# EAGLE board avr_lag1 (EAGLE 5.07)
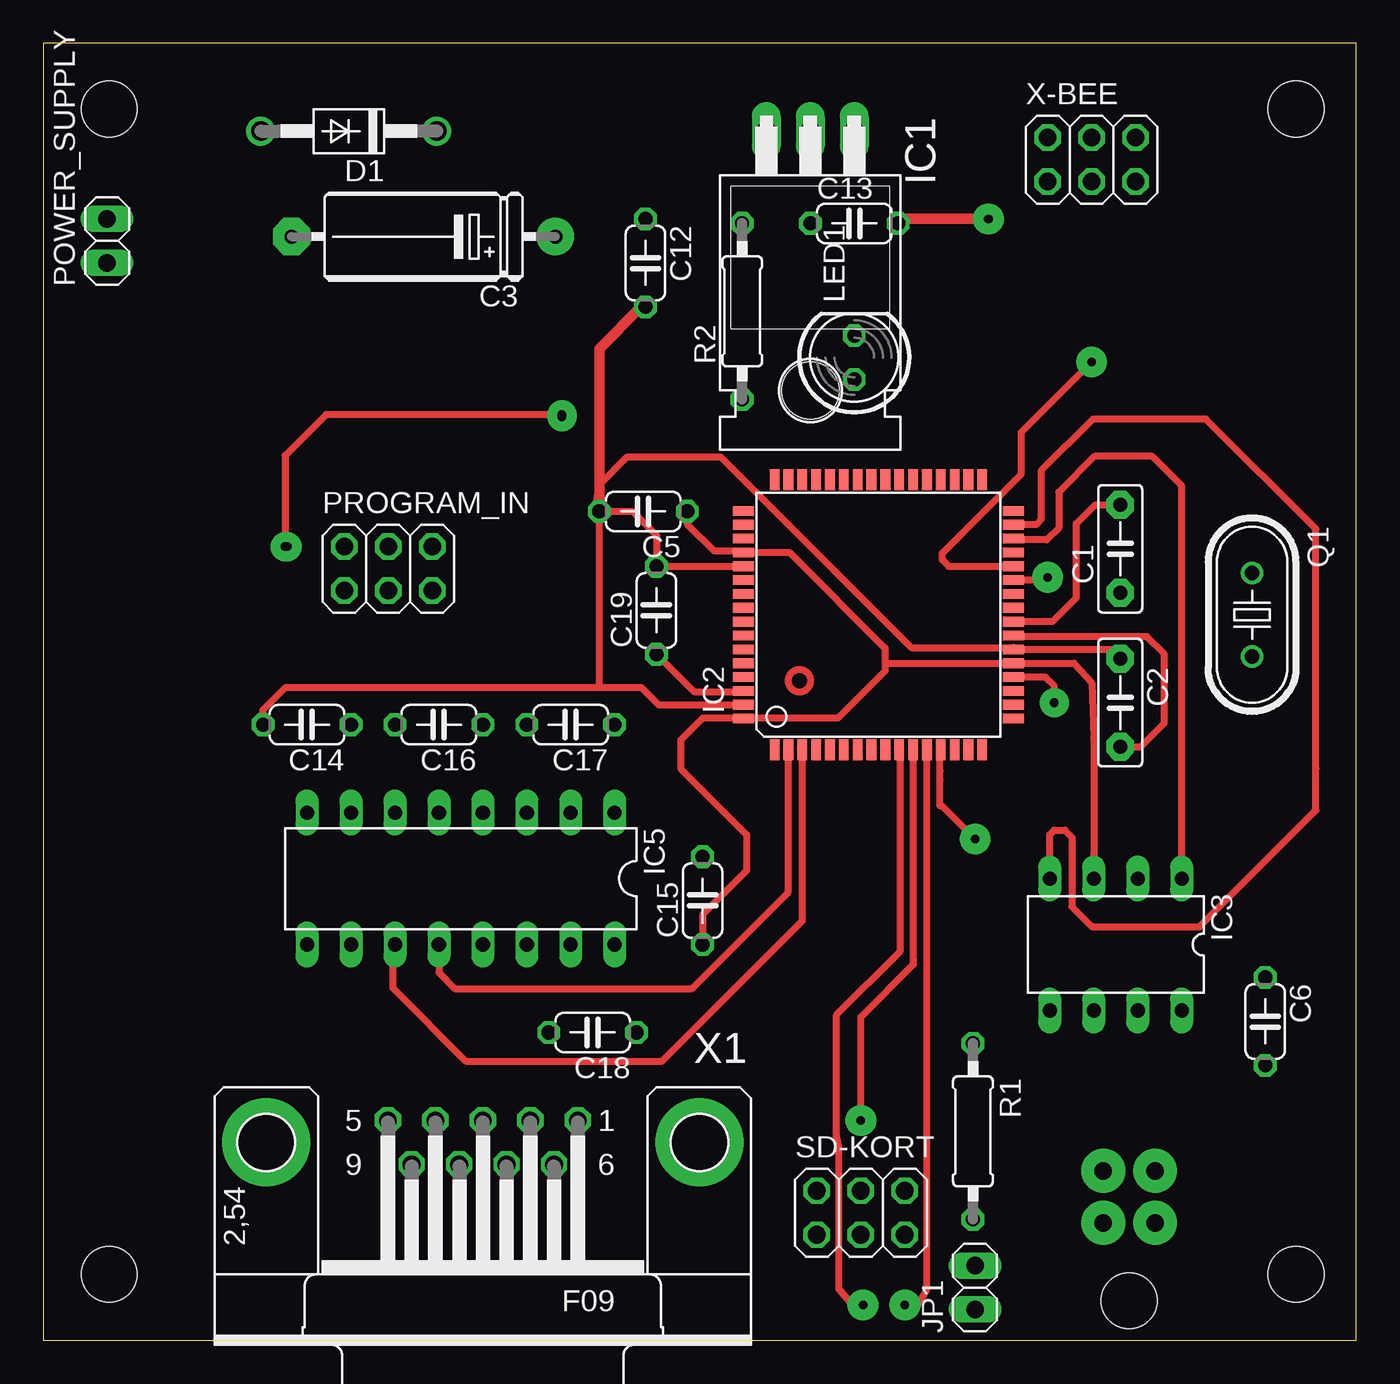
[diagram p0: board, top side]
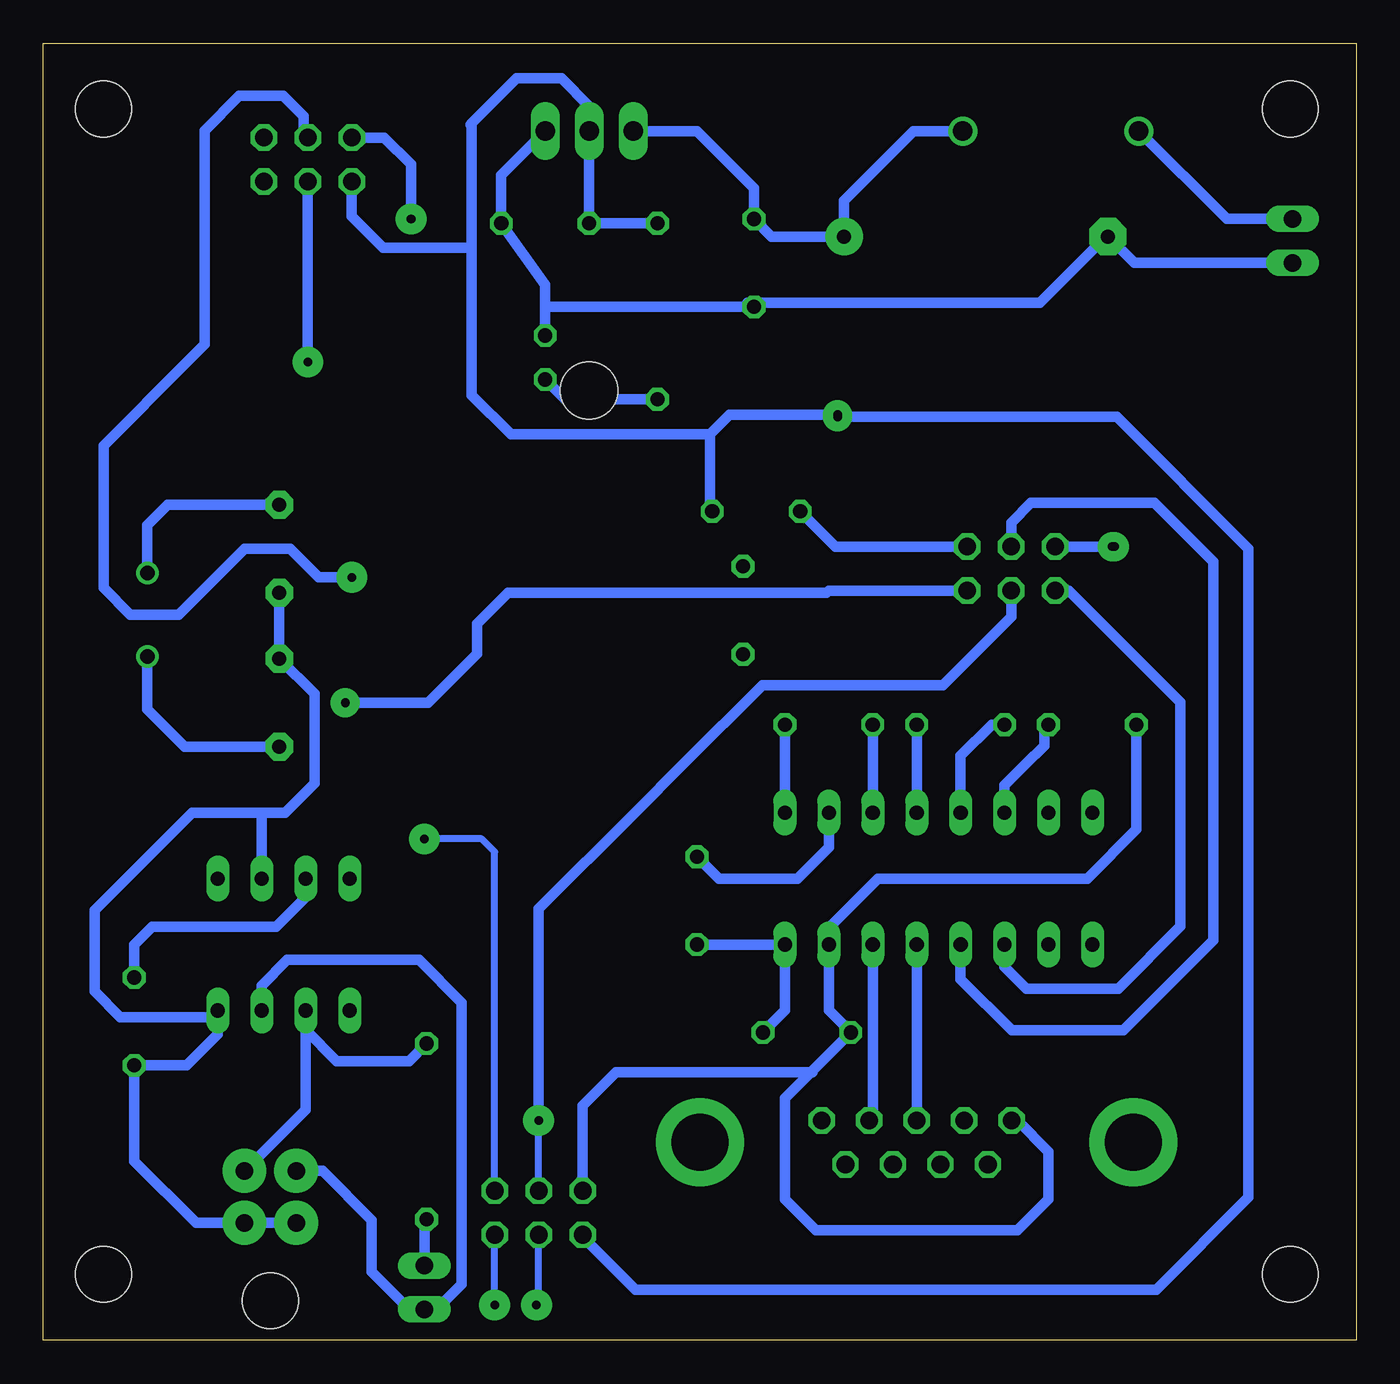
[diagram p1: board, bottom side, seen from below]

Size 75.87 x 74.92 mm. Coordinates in mm from the lower left corner, seen from the top.
Outline: 0,0 75.87,0 75.87,74.92 0,74.92 0,0
Copper layers (1*16): Top 0.035mm / dielectric 1.5mm / Bottom 0.035mm
Design rules "default": minimum track width 10mil, minimum drill 24mil, track to track 8mil, track to pad 8mil, pad to pad 8mil, via to via 8mil, smd to smd 8mil, copper to edge 40mil, drill to drill 8mil, minimum pad ring 10mil, minimum via ring 8mil, stop-mask expansion 4mil, vias tented up to drill 0mil, thermal gap 10mil
Holes 3.2 mm at 3.81,3.81 3.81,71.12 72.39,71.12 72.39,3.81

## Footprints (pad centres in the part's own frame; a part is rotated, then mirrored left to right if it is on the bottom)
C5B2.5 = drill 0.813 pad 1.6 octagon: 1 -2.54,0; 2 2.54,0
E15-5 = drill 0.813 pad 2.159 round: + -7.62,0 | drill 0.813 pad 2.159 octagon: - 7.62,0
C050-024X044 = drill 0.813 octagon: 1 -2.54,0; 2 2.54,0
DO41-10 = drill 1.118 round: A 5.08,0; C -5.08,0
TO220H = drill 1.118 long: 1 -2.54,-10.16; 2 0,-10.16; 3 2.54,-10.16 | hole 3.302: 0,4.826
TQFP64 = smd 1.194 x 0.559: 1 -7.8,6; 2 -7.8,5.2; 3 -7.8,4.4; 4 -7.8,3.6; 5 -7.8,2.8; 6 -7.8,2; 7 -7.8,1.2; 8 -7.8,0.4; 9 -7.8,-0.4; 10 -7.8,-1.2; 11 -7.8,-2; 12 -7.8,-2.8; 13 -7.8,-3.6; 14 -7.8,-4.4; 15 -7.8,-5.2; 16 -7.8,-6; 33 7.8,-6; 34 7.8,-5.2; 35 7.8,-4.4; 36 7.8,-3.6; 37 7.8,-2.8; 38 7.8,-2; 39 7.8,-1.2; 40 7.8,-0.4; 41 7.8,0.4; 42 7.8,1.2; 43 7.8,2; 44 7.8,2.8; 45 7.8,3.6; 46 7.8,4.4; 47 7.8,5.2; 48 7.8,6 | smd 0.559 x 1.194: 17 -6,-7.8; 18 -5.2,-7.8; 19 -4.4,-7.8; 20 -3.6,-7.8; 21 -2.8,-7.8; 22 -2,-7.8; 23 -1.2,-7.8; 24 -0.4,-7.8; 25 0.4,-7.8; 26 1.2,-7.8; 27 2,-7.8; 28 2.8,-7.8; 29 3.6,-7.8; 30 4.4,-7.8; 31 5.2,-7.8; 32 6,-7.8; 49 6,7.8; 50 5.2,7.8; 51 4.4,7.8; 52 3.6,7.8; 53 2.8,7.8; 54 2,7.8; 55 1.2,7.8; 56 0.4,7.8; 57 -0.4,7.8; 58 -1.2,7.8; 59 -2,7.8; 60 -2.8,7.8; 61 -3.6,7.8; 62 -4.4,7.8; 63 -5.2,7.8; 64 -6,7.8
DIL08 = drill 0.813 long: 1 -3.81,-3.81; 2 -1.27,-3.81; 3 1.27,-3.81; 4 3.81,-3.81; 5 3.81,3.81; 6 1.27,3.81; 7 -1.27,3.81; 8 -3.81,3.81
DIL16 = drill 0.813 long: 1 -8.89,-3.81; 2 -6.35,-3.81; 3 -3.81,-3.81; 4 -1.27,-3.81; 5 1.27,-3.81; 6 3.81,-3.81; 7 6.35,-3.81; 8 8.89,-3.81; 9 8.89,3.81; 10 6.35,3.81; 11 3.81,3.81; 12 1.27,3.81; 13 -1.27,3.81; 14 -3.81,3.81; 15 -6.35,3.81; 16 -8.89,3.81
1X02 = drill 1.016 long: 1 -1.27,0; 2 1.27,0
LED5MM = drill 0.813 octagon: A -1.27,0; K 1.27,0
2X03 = drill 1.016 octagon: 1 -2.54,-1.27; 2 -2.54,1.27; 3 0,-1.27; 4 0,1.27; 5 2.54,-1.27; 6 2.54,1.27
HC49U70 = drill 0.813 round: 1 -2.413,0; 2 2.413,0
0207/10 = drill 0.813 octagon: 1 -5.08,0; 2 5.08,0
MICROFIT4SOCK = drill 1 pad 2.54 round: PIN1 -2,0; PIN2 1,0; PIN3 -2,-3; PIN4 1,-3 | hole 3.2: -0.5,-7.5
F09HP = drill 1.016 octagon: 1 -5.486,-1.27; 2 -2.743,-1.27; 3 0,-1.27; 4 2.743,-1.27; 5 5.486,-1.27; 6 -4.115,1.27; 7 -1.372,1.27; 8 1.372,1.27; 9 4.115,1.27 | drill 3.302 pad 5.08 round: G1 -12.522,0; G2 12.522,0

## Placement (x,y rotation side)
C1  22pF  [C5B2.5]  62.23,45.72 90 top
C2  22pF  [C5B2.5]  62.23,36.83 270 top
C3  330uF  [E15-5]  21.97,63.75 180 top
C5  100nF  [C050-024X044]  34.67,47.88 180 top
C6  100nF  [C050-024X044]  70.61,18.41 270 top
C12  100nF  [C050-024X044]  34.8,62.23 270 top
C13  100nF  [C050-024X044]  46.86,64.52 0 top
C14  100nF  [C050-024X044]  15.24,35.56 180 top
C15  100nF  [C050-024X044]  38.1,25.4 90 top
C16  100nF  [C050-024X044]  22.86,35.56 180 top
C17  100nF  [C050-024X044]  30.48,35.56 180 top
C18  100nF  [C050-024X044]  31.75,17.78 180 top
C19  100nF  [C050-024X044]  35.43,42.16 90 top
D1  1N4004  [DO41-10]  17.65,69.85 180 top
IC1  317T  [TO220H]  44.32,59.69 180 top
IC2  MEGA128-A  [TQFP64]  48.26,41.91 90 top
IC3  PCA82C250  [DIL08]  61.98,22.86 180 top
IC5  MAX232  [DIL16]  24.13,26.67 180 top
JP1  [1X02]  53.85,3.05 90 top
LED1  [LED5MM]  46.86,56.77 90 top
POWER_SUPPLY  [1X02]  3.68,63.5 90 top
PROGRAM_IN  [2X03]  19.94,44.58 0 top
Q1  18.4320 MHz  [HC49U70]  69.85,41.91 270 top
R1  120  [0207/10]  53.72,12.06 270 top
R2  250  [0207/10]  40.39,59.44 90 top
SD-KORT  [2X03]  47.24,7.37 0 top
U$1  MICROFIT4  [MICROFIT4SOCK]  63.25,9.78 0 top
X1  [F09HP]  25.4,11.43 180 top
X-BEE  [2X03]  60.58,68.2 0 top

## Library data of the parts
C1 C2 = capacitor-wima
C3 C5 C6 C12-C19 = rcl
D1 = diode
IC1 = linear
IC2 = atmel
IC3 = micro-philips
IC5 = maxim
JP1 POWER_SUPPLY PROGRAM_IN SD-KORT X-BEE = pinhead
LED1 = led
Q1 = crystal
R1 R2 = resistor
U$1 = UNICORN
X1 = con-subd

## Nets
+5V: C5.1 C6.1 C13.1 C15.1 C18.1 IC1.2 IC2.21 IC2.52 IC2.64 IC3.3 IC5.16 PROGRAM_IN.2 R2.2 SD-KORT.1 X-BEE.1
CANJUMP1: IC3.7 JP1.1 U$1.PIN1
CANJUMP2: JP1.2 R1.2
CS: IC2.10 SD-KORT.3
MISO/TXD0: IC2.3 IC5.11 PROGRAM_IN.1
MOSI/RXD0: IC2.2 IC5.12 PROGRAM_IN.4
N$1: C1.2 IC2.24 Q1.1
N$2: C2.2 IC2.23 Q1.2
N$5: D1.A POWER_SUPPLY.2
N$6: LED1.A R2.1
N$10: C19.1 IC2.62
N$21: IC5.13 X1.3
N$33: IC5.14 X1.2
N$35: C17.1 IC5.1
N$36: C17.2 IC5.3
N$37: C16.1 IC5.4
N$38: C16.2 IC5.5
N$39: C14.1 IC5.6
N$41: C15.2 IC5.2
N$51: IC3.6 R1.1 U$1.PIN2
PE: C1.1 C2.1 C3.- C5.2 C6.2 C12.2 C13.2 C14.2 C18.2 C19.2 IC1.1 IC2.22 IC2.53 IC2.63 IC3.2 IC3.8 IC5.15 LED1.K POWER_SUPPLY.1 PROGRAM_IN.6 SD-KORT.2 U$1.PIN3 U$1.PIN4 X1.5 X-BEE.2
RESET: IC2.20 PROGRAM_IN.5
RXCAN: IC2.31 IC3.4
RXD1: IC2.27 X-BEE.4
SCK: IC2.11 PROGRAM_IN.3 SD-KORT.4
SDMISO: IC2.13 SD-KORT.6
SDMOSI: IC2.12 SD-KORT.5
TXCAN: IC2.30 IC3.1
TXD1: IC2.28 X-BEE.3
VCC: C3.+ C12.1 D1.C IC1.3

## Tracks (layer width: path | path; a pad name or v marks a point on that pad's centre or on a via)
+5V  (via drill 0.5 pad 1.68)
  Top 0.254: C6.1 70.87,21.21
  Top 0.406: C5.1 37.21,47.14 38.76,45.59 40.46,45.59 IC2.52 43.12,45.51 48.64,39.98 48.64,39.12 | IC2.21 59.56,39.12 60.58,37.97 60.71,34.82 60.71,28.06 IC3.3 60.71,27.79 | IC2.21 | 48.64,39.12 IC2.21 | 40.46,35.94 IC2.64 40.46,35.94 | 40.46,35.94 45.92,35.94 48.64,38.66 48.64,39.12 | C15.1 38.1,24.59 38.91,25.4 40.64,27.13 40.64,29.21 38.1,31.75 36.83,33.02 36.83,34.67 38.1,35.94 40.46,35.94 | 13.97,45.85 v14.1,45.85 | 13.97,45.85 v14.1,45.85 | 13.97,45.85 v14.1,45.85 | 16.33,53.47 v29.97,53.47 16.33,53.47 | 16.33,53.47 13.97,51.1 13.97,45.85
  Bottom 0.61: C18.1 33.02,19.05 IC5.16 C15.1 | IC1.2 C13.1 | C13.1 R2.2 | IC1.2 C13.1 | C6.1 70.61,22.85 69.59,23.88 62.41,23.88 60.71,25.59 IC3.3 | v14.1,45.85 PROGRAM_IN.2 | C5.1 37.34,47.88 37.34,52.2 | 37.34,52.32 37.34,52.2 | 37.34,52.32 37.34,52.2 | 37.34,52.32 37.34,52.33 36.2,53.47 v29.97,53.47 29.97,53.34 13.85,53.34 6.22,45.72 6.22,8.26 11.56,2.92 41.66,2.92 44.83,6.1 SD-KORT.1 | 51.12,70.29 48.51,72.9 45.93,72.9 44.32,71.29 IC1.2 | 51.12,70.29 51.18,70.23 | 37.34,52.32 48.85,52.32 51.12,54.59 51.12,62.99 | 51.12,62.99 51.12,70.29 | X-BEE.1 58.04,64.92 56.24,63.12 51.12,63.12 51.12,62.99
CANJUMP1
  Bottom 0.61: IC3.7 63.25,20.49 61.77,21.97 54.16,21.97 51.69,19.5 51.69,3.23 53.14,1.78 JP1.1 53.85,2.16 55.1,2.16 56.9,3.96 56.9,6.94 59.74,9.78 U$1.PIN1
CANJUMP2
  Bottom 0.61: R1.2 53.85,6.99 JP1.2
CS  (via drill 0.5 pad 1.78)
  Top 0.406: IC2.10 49.53,34.11 49.53,22.48 45.85,18.8 45.85,11.81 45.97,11.18 45.97,2.95 46.76,2.03 v47.37,2.03 47.37,1.91 47.06,1.91
  Bottom 0.406: v47.37,2.03 47.24,2.03 SD-KORT.3
MISO/TXD0
  Top 0.406: IC5.11 20.19,22.86 20.19,20.35 24.41,16.13 35.76,16.13 43.86,24.23 IC2.3
  Bottom 0.61: PROGRAM_IN.1 16.61,43.31 10.16,36.85 10.16,23.91 13.75,20.32 19.05,20.32 20.32,21.59 IC5.11
MOSI/RXD0
  Top 0.406: IC5.12 22.86,21.24 23.78,20.32 37.49,20.32 43.06,25.89 IC2.2
  Bottom 0.61: PROGRAM_IN.4 19.94,47.24 18.79,48.39 11.66,48.39 8.26,44.98 8.26,23.12 13.47,17.91 19.91,17.91 22.86,20.86 IC5.12
N$1
  Top 0.406: C1.2 60.78,48.26 59.69,47.17 59.69,42.88 58.34,41.53 56.06,41.53 IC2.24
  Bottom 0.61: C1.2 68.68,48.26 69.85,47.09 Q1.1
N$2
  Top 0.406: 56.06,40.64 IC2.23 56.06,40.64 | C2.2 63.42,34.29 64.77,35.64 64.77,39.65 63.78,40.64 56.06,40.64
  Bottom 0.61: C2.2 67.69,34.29 69.85,36.45 Q1.2
N$3  (via drill 0.5 pad 1.68)
  other vias: 58.42,36.83
N$4  (via drill 0.5 pad 1.68)
  other vias: 29.97,53.34
N$5
  Bottom 0.61: POWER_SUPPLY.2 7.49,64.77 D1.A
N$6
  Bottom 0.61: R2.1 45.72,54.36 LED1.A
N$7  (via drill 0.5 pad 1.68)
  other vias: 13.97,45.85
N$10
  Top 0.406: C19.1 35.56,39.62 35.56,39.51 37.61,37.47 40.46,37.47 IC2.62
N$21
  Bottom 0.61: X1.3 IC5.13
N$33
  Bottom 0.254: X1.2 27.94,12.7
  Bottom 0.61: 27.94,12.7 IC5.14
N$35
  Bottom 0.61: IC5.1 C17.1
N$36
  Bottom 0.61: IC5.3 C17.2
N$37
  Bottom 0.61: IC5.4 C16.1
N$38
  Bottom 0.61: C16.2 21.06,35.56 22.86,33.76 IC5.5
N$39
  Bottom 0.61: C14.1 18.03,35.56 18.03,34.35 19.11,33.27 20.32,32.07 IC5.6
N$41
  Bottom 0.61: IC5.2 30.48,28.47 32.28,26.67 36.83,26.67 C15.2
N$51
  Bottom 0.61: R1.1 54.74,16.13 58.91,16.13 60.71,17.93 IC3.6 60.71,13.32 U$1.PIN2
PE  (via drill 0.5 pad 1.78)
  Top 0.406: IC2.53 C19.2 35.43,46.51 34.06,47.88 C5.2 31.88,47.88 | IC2.63 35.56,36.71 34.55,37.72 32.13,37.72 | 32.13,37.72 14.61,37.72 14.01,37.72 12.7,36.41 C14.2 | 32.13,47.75 31.88,47.88 | 32.13,37.72 32.13,47.75 | 32.13,47.75 31.88,47.88 | 31.88,47.88 32.13,49.42 33.74,51.03 39.14,51.03 50.16,40.01 56.06,40.01 IC2.22 62.23,39.91 C2.1
  Top 0.61: C12.2 34.54,59.69 32.13,57.28 32.13,49.42 C5.2 | v54.61,64.77 49.4,64.77 C13.2
  Bottom 0.61: C14.2 12.7,29.51 15.54,26.67 27.64,26.67 30.48,23.83 IC5.15 30.48,19.05 C18.2 31.43,15.56 | IC1.1 49.4,67.31 C13.2 46.86,60.96 LED1.K 46.86,59.69 C12.2 35.18,59.94 18.29,59.94 14.48,63.75 C3.- 12.83,62.23 POWER_SUPPLY.1 | C1.1 C2.1 60.2,37.34 60.2,32.19 61.91,30.48 62.99,30.48 | X1.5 19.58,12.7 17.78,10.9 17.78,8.15 19.58,6.35 31.22,6.35 33.02,8.15 33.02,13.97 31.75,15.24 31.43,15.56 | IC3.2 63.25,28.83 63.25,30.48 62.99,30.48 | C5.2 30.1,45.85 PROGRAM_IN.6 | U$1.PIN3 U$1.PIN4 67.05,6.78 70.61,10.34 C6.2 67.59,15.88 65.79,17.68 IC3.8 65.79,18.67 71.42,18.67 72.9,20.15 72.9,24.85 71.08,26.67 70.1,27.65 67.27,30.48 62.99,30.48 | v54.61,64.77 54.61,67.92 56.16,69.47 X-BEE.2 | SD-KORT.2 44.7,13.55 42.76,15.49 31.43,15.49 31.43,15.56
RESET  (via drill 0.5 pad 1.68)
  Top 0.406: v58.42,36.83 58.42,37.8 57.91,38.31 IC2.20
  Bottom 0.61: v58.42,36.83 53.64,36.83 50.8,39.67 50.8,41.38 49,43.18 30.61,43.18 30.48,43.31 PROGRAM_IN.5
RXCAN
  Top 0.406: 58.29,26.67 IC3.4 58.17,29.21 58.42,29.46 59.03,29.46 59.44,29.06 59.44,25.05 60.61,23.88 63.12,23.88 66.8,23.88 73.53,30.61 73.53,33.02 73.53,46.86 67.18,53.21 60.66,53.21 57.66,50.22 57.66,47.4 57.37,47.12 IC2.31
RXD1  (via drill 0.5 pad 1.78)
  Top 0.406: v58.04,44.07 58.04,43.94 56.06,43.94 IC2.27
  Bottom 0.61: X-BEE.4 60.83,69.47 60.83,70.71 62,71.88 64.54,71.88 66.55,69.87 66.55,57.52 67.55,56.52 72.39,51.68 72.39,46.49 72.39,43.48 70.84,41.91 68.03,41.91 65.53,44.41 64.22,45.72 61.59,45.72 59.94,44.07 v58.04,44.07
SCK  (via drill 0.5 pad 1.78)
  Top 0.406: IC2.11 50.29,34.11 50.29,21.97 50.29,21.72 47.24,18.67 47.24,18.03 v47.24,12.7
  Bottom 0.406: SD-KORT.4 47.24,12.57 v47.24,12.7
  Bottom 0.61: PROGRAM_IN.3 19.94,41.79 23.88,37.85 34.31,37.85 38.86,33.3 41.68,30.48 47.24,24.92 47.24,12.57
SDMISO  (via drill 0.5 pad 1.78)
  Top 0.406: IC2.13 51.82,34.11 51.82,32.89 51.82,32.38 51.82,30.86 51.94,30.86 v53.85,28.96
  Bottom 0.406: SD-KORT.6 49.78,28.21 50.53,28.96 v53.85,28.96
SDMOSI  (via drill 0.5 pad 1.78)
  Top 0.406: IC2.12 51.05,2.93 50.54,2.03 v49.78,2.03
  Bottom 0.406: v49.78,2.03 SD-KORT.5
TXCAN
  Top 0.406: IC2.30 56.06,46.23 57.99,46.23 58.67,46.91 58.67,48.99 60.74,51.05 64.08,51.05 65.79,49.35 65.79,34.19 65.79,28.17 IC3.1
TXD1  (via drill 0.5 pad 1.78)
  Top 0.406: v60.58,56.52 56.52,52.45 56.52,50.04 56.13,49.66 51.94,45.47 51.94,45.09 52.32,44.7 IC2.28
  Bottom 0.61: v60.58,56.52 X-BEE.3
VCC
  Bottom 0.61: D1.C 25.57,69.85 29.59,65.83 C3.+ 33.78,63.75 C12.1 34.8,66.56 38.09,69.85 IC1.3
(copper drawn outside any net)
  shapes: Top circle x1